# EAGLE board DRV2605L Lab 1 schematic (EAGLE 9.5.0)

Size 160 x 100 mm. Coordinates in mm from the lower left corner, seen from the top.
Outline: 0,0 160,0 160,100 0,100 0,0
Copper layers (1*16): Top 0.035mm / dielectric 1.5mm / Bottom 0.035mm
Design rules "default": minimum track width 6mil, minimum drill 0.35mm, track to track 6mil, track to pad 6mil, pad to pad 6mil, via to via 6mil, smd to smd 6mil, copper to edge 40mil, drill to drill 6mil, minimum pad ring 10mil, minimum via ring 8mil, stop-mask expansion 4mil, vias tented up to drill 0mil, thermal gap 10mil

## Footprints (pad centres in the part's own frame; a part is rotated, then mirrored left to right if it is on the bottom)
SMT-JUMPER_3_2-NC_PASTE_SILK = smd 0.635 x 1.27: 1 -0.813,0; 2 0,0; 3 0.813,0
0805 = smd 0.8 x 1.2: 1 -0.9,0; 2 0.9,0
1X02 = drill 1.016 pad 1.88: 1 0,0; 2 2.54,0
1X06 = drill 1.016 pad 1.88: 1 0,0; 2 2.54,0; 3 5.08,0; 4 7.62,0; 5 10.16,0; 6 12.7,0
VSSOP-10 = smd 1.45 x 0.3: P$1 -1.905,1.06; P$2 -1.905,0.56; P$3 -1.905,0.06; P$4 -1.905,-0.44; P$5 -1.905,-0.94; P$6 2.495,-0.94; P$7 2.495,-0.44; P$8 2.495,0.06; P$9 2.495,0.56; P$10 2.495,1.06

## Placement (x,y rotation side)
12C  JUMPER-SMT_3_2-NC_PASTE_SILK  [SMT-JUMPER_3_2-NC_PASTE_SILK]  17.78,26.67 0 top
C1  1.0uF  [0805]  64.77,3.81 0 top
C3  1.0uF  [0805]  24.13,2.54 0 top
J2  [1X02]  55.88,7.62 90 top
JP1  [1X06]  6.35,5.08 90 top
R1  2.2k  [0805]  22.86,21.59 0 top
R2  2.2k  [0805]  13.97,21.59 0 top
U1  DRV2605L  [VSSOP-10]  30.48,12.7 0 top

## Library data of the parts
12C = SparkFun-Jumpers
C1 C3 = SparkFun-Capacitors; PROD_ID: CAP-08064
J2 = SparkFun-Connectors
JP1 = SparkFun-Connectors; PROD_ID: CONN-08437
R1 R2 = SparkFun-Resistors
U1 = SparkFun-IC-Special-Function; PROD_ID: IC-13504

## Nets
GND: C1.1 C3.1 JP1.6 U1.P$8
N$1: JP1.4 R2.1 U1.P$3
N$2: JP1.3 R1.1 U1.P$2
N$3: JP1.2 U1.P$4
N$4: JP1.1 U1.P$5
N$5: 12C.3 R2.2
N$6: 12C.1 R1.2
N$7: C3.2 U1.P$1
N$8: J2.1 U1.P$9
N$9: J2.2 U1.P$7
VCC: 12C.2 C1.2 JP1.5 U1.P$6 U1.P$10

## Tracks (layer width: path | path; a pad name or v marks a point on that pad's centre or on a via)
GND  (3 unrouted)
N$1  (2 unrouted)
N$2  (2 unrouted)
N$3  (1 unrouted)
N$4  (1 unrouted)
N$5  (1 unrouted)
N$6  (1 unrouted)
N$7  (1 unrouted)
N$8  (1 unrouted)
N$9  (1 unrouted)
VCC  (4 unrouted)